# EAGLE board Ver1_ConEDIT1 (EAGLE 7.6.0)
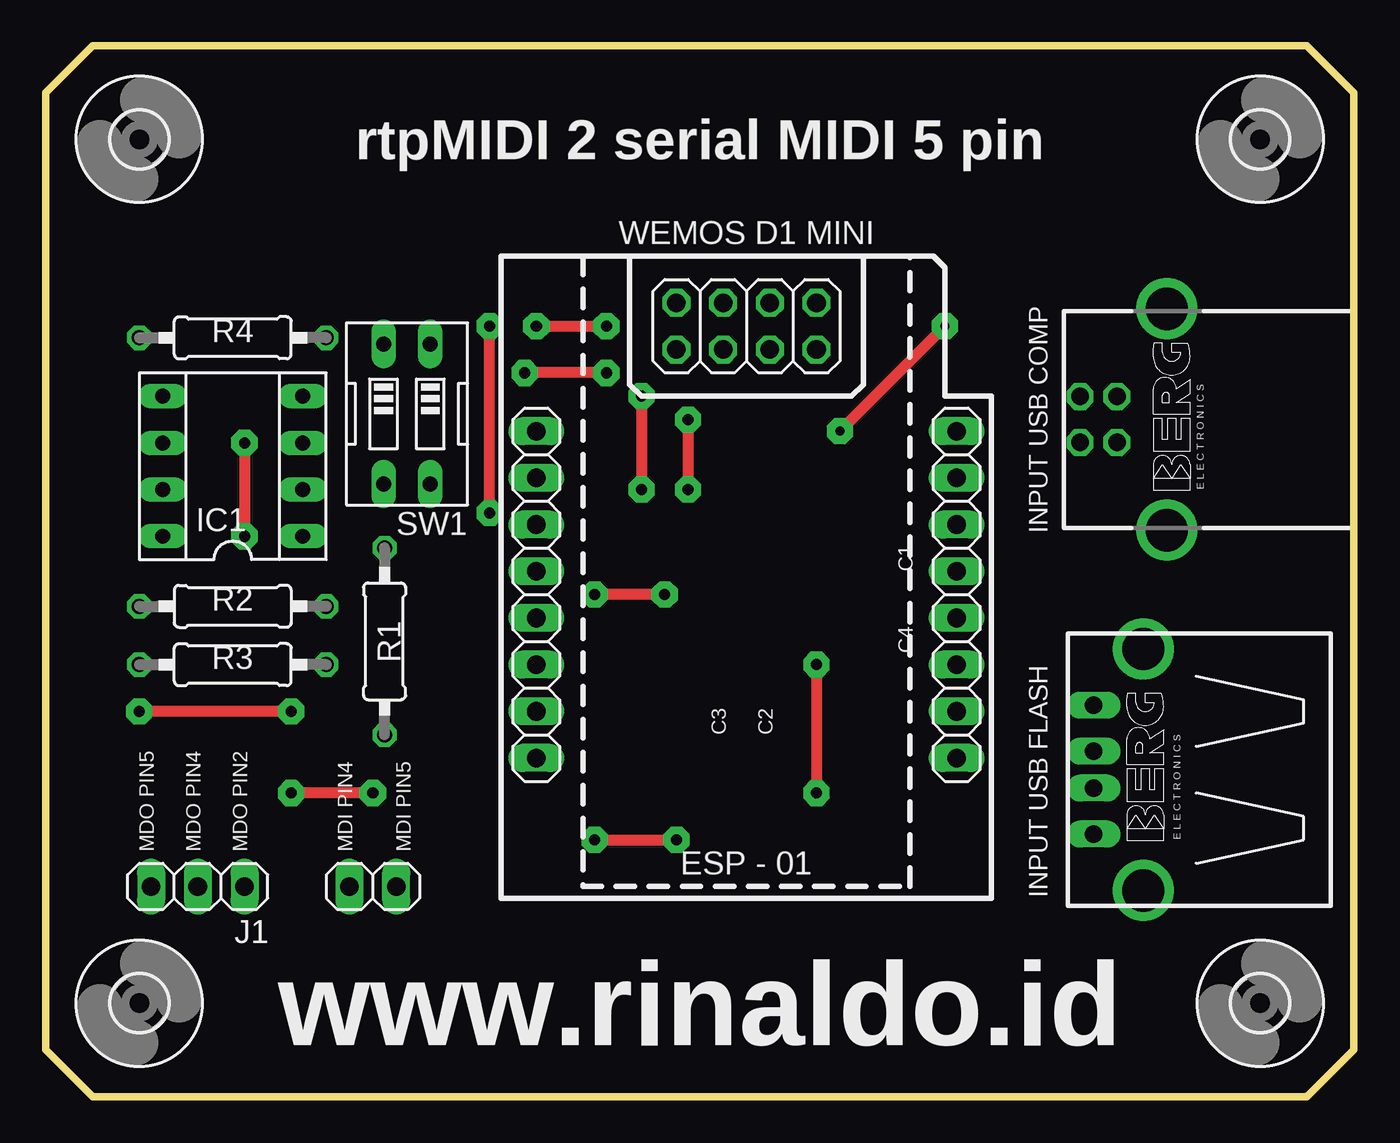
[diagram p0: board, top side]
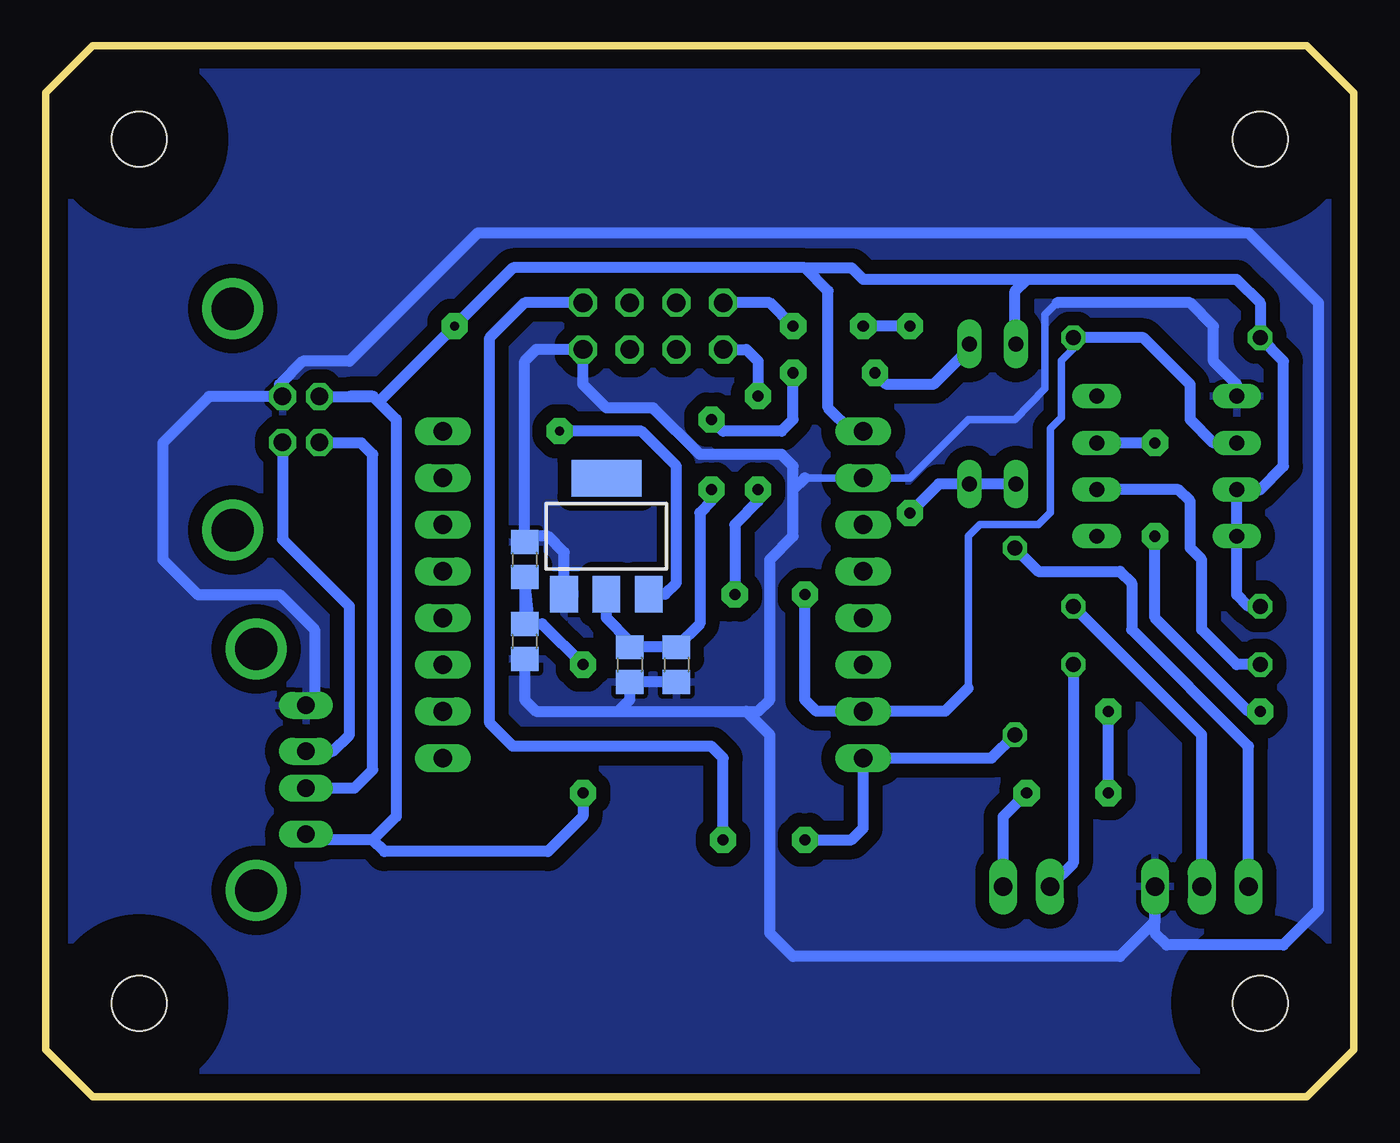
[diagram p1: board, bottom side, seen from below]

Size 71.12 x 57.15 mm. Coordinates in mm from the lower left corner, seen from the top.
Outline: 2.54,0 68.58,0 71.12,2.54 71.12,54.61 68.58,57.15 2.54,57.15 0,54.61 0,2.54 2.54,0
Copper layers (1*16): Top 0.035mm / dielectric 1.5mm / Bottom 0.035mm
Design rules "default": minimum track width 10mil, minimum drill 24mil, track to track 8mil, track to pad 8mil, pad to pad 8mil, via to via 8mil, smd to smd 8mil, copper to edge 40mil, drill to drill 8mil, minimum pad ring 10mil, minimum via ring 8mil, stop-mask expansion 4mil, vias tented up to drill 0mil, thermal gap 10mil

## Footprints (pad centres in the part's own frame; a part is rotated, then mirrored left to right if it is on the bottom)
2X04 = drill 1.016 octagon: 1 -3.81,-1.27; 2 -3.81,1.27; 3 -1.27,-1.27; 4 -1.27,1.27; 5 1.27,-1.27; 6 1.27,1.27; 7 3.81,-1.27; 8 3.81,1.27
1X02 = drill 1.016 long: 1 -1.27,0; 2 1.27,0
PN61729-S = drill 0.95 octagon: 1 1.25,4.71; 2 -1.25,4.71; 3 -1.25,2.71; 4 1.25,2.71 | drill 2.3 pad 2.9: S1 -6.02,0; S2 6.02,0
1X08 = drill 1.016 long: 1 -8.89,0; 2 -6.35,0; 3 -3.81,0; 4 -1.27,0; 5 1.27,0; 6 3.81,0; 7 6.35,0; 8 8.89,0
PN87520-S = drill 0.95 long: 1 -3.5,2.71; 2 -1,2.71; 3 1,2.71; 4 3.5,2.71 | drill 2.3 pad 2.9: S1 -6.57,0; S2 6.57,0
SOT223 = smd 1.5 x 2: 1 -2.3,-3.15; 2 0,-3.15; 3 2.3,-3.15 | smd 3.8 x 2: 4 0,3.15
C0805 = smd 1.3 x 1.5: 1 -0.95,0; 2 0.95,0
3,0 = hole 3: 0,0
SOCKET-08 = drill 0.813 long: 1 -3.81,-3.81; 2 -1.27,-3.81; 3 1.27,-3.81; 4 3.81,-3.81; 5 3.81,3.81; 6 1.27,3.81; 7 -1.27,3.81; 8 -3.81,3.81
1X03 = drill 1.016 long: 1 -2.54,0; 2 0,0; 3 2.54,0
0207/10 = drill 0.813 octagon: 1 -5.08,0; 2 5.08,0
EDG-02 = drill 0.813 long: 1 -1.27,-3.81; 2 1.27,-3.81; 3 1.27,3.81; 4 -1.27,3.81

## Placement (x,y rotation side)
E$1  [2X04]  38.1,41.91 0 top
E$2  [1X02]  17.78,11.43 0 top
E$3  [PN61729-S]  60.96,36.83 90 top
E$4  [1X08]  26.67,27.3 90 top
E$6  [PN87520-S]  59.69,17.78 90 top
E$7  [1X08]  49.53,27.3 90 top
E$11  [SOT223]  40.64,30.48 0 bottom
E$12  [C0805]  39.37,23.49 270 bottom
E$13  [C0805]  45.09,24.77 270 bottom
E$14  [3,0]  66.04,52.07 0 top
E$15  [C0805]  36.83,23.49 270 bottom
E$16  [C0805]  45.09,29.21 270 bottom
E$17  [3,0]  66.04,5.08 0 top
E$18  [3,0]  5.08,52.07 0 top
E$19  [3,0]  5.08,5.08 0 top
IC1  [SOCKET-08]  10.16,34.29 90 top
J1  [1X03]  8.25,11.43 180 top
R1  [0207/10]  18.41,24.77 270 top
R2  [0207/10]  10.16,26.67 180 top
R3  [0207/10]  10.16,23.49 0 top
R4  [0207/10]  10.16,41.27 0 top
SW1  [EDG-02]  19.63,37.13 180 top

## Library data of the parts
E$1 E$2 E$4 E$7 J1 = pinhead
E$3 E$6 = con-berg
E$11 = v-reg
E$12 E$13 E$15 E$16 R1-R4 = rcl
E$14 E$17-E$19 = holes
IC1 = ic-package
SW1 = special

## Nets
GND: E$3.4 E$6.4 E$11.1 E$12.2 E$13.2 E$15.2 E$16.1 IC1.5 J1.1
S$1: IC1.2 R3.1
S$2: E$11.2 E$12.1 E$15.1
S$3: IC1.6 R4.2
S$4: E$1.2 SW1.3 SW1.4
S$6: J1.3 R1.1
S$7: E$4.1 R1.2
S$8: J1.2 R2.1
S$10: E$3.2 E$6.2
S$11: E$3.3 E$6.3
S$12: E$2.2 IC1.3
S$13: E$2.1 R3.2
S$14: E$3.1 E$6.1 E$11.3 E$13.1 E$16.2 IC1.7 IC1.8 R2.2 R4.1

## Tracks (layer width: path | path; a pad name or v marks a point on that pad's centre or on a via)
GND
  Bottom 0.406: 29.84,33.66 24.13,33.66 20.95,36.83 18.41,36.83 16.79,38.51 16.79,42.55 16.13,43.18
  Bottom 0.61: E$6.4 56.52,21.74 56.52,25.4 58.42,27.3 62.86,27.3 64.77,29.21 64.77,35.56 62.25,38.08 E$3.4 58.42,38.25 58.42,38.73 57.15,40 54.61,40 47.62,46.99 5.71,46.99 1.9,43.18 1.9,10.16 3.81,8.26 10.16,8.26 10.79,8.89 J1.1 10.79,9.53 12.7,7.62 30.48,7.62 31.75,8.89 31.75,19.69 33.02,20.95 | E$13.2 45.09,21.59 44.45,20.95 40,20.95 | E$15.2 E$12.2 39.37,21.59 40,20.95 | 40,20.95 33.02,20.95 | 33.02,20.95 32.38,20.95 31.75,21.59 31.75,29.21 30.48,30.48 30.48,33.02 | 30.48,33.02 30.48,34.29 31.12,34.92 35.56,34.92 38.1,37.46 40.64,37.46 41.91,38.73 41.91,40.64 44.45,40.64 45.09,40 E$16.1 44.77,30.48 43.81,30.48 42.94,29.6 E$11.1 | 30.48,33.02 29.84,33.66 | 16.13,43.18 8.89,43.18 7.62,41.91 7.62,40 6.35,38.73 IC1.5
  pour Bottom (isolate 0.762): 0,54.61 2.54,57.15 68.58,57.15 71.12,54.61 71.12,2.54 68.58,0 2.54,0 0,2.54
S$1
  Bottom 0.61: IC1.2 9.52,33.02 8.89,32.38 8.89,29.84 8.25,29.21 8.25,25.4 6.35,23.49 R3.1
S$2  (via drill 0.6 pad 1.42)
  Top 0.61: v34.92,36.83 v34.92,33.02 | v30.48,39.37 v26.03,39.37
  Bottom 0.61: E$11.2 40.64,26.03 39.37,24.77 E$12.1 E$15.1 35.56,25.71 35.56,31.75 34.92,32.38 v34.92,33.02 | v34.92,36.83 34.29,36.2 31.12,36.2 30.48,36.83 v30.48,39.37 | v26.03,39.37 25.4,38.73 22.86,38.73 20.95,40.64
S$3  (via drill 0.6 pad 1.42)
  Top 0.61: v32.38,38.1 v32.38,33.02 | v33.66,27.3 v29.84,27.3
  Bottom 0.406: 20.95,22.23 20.95,30.48 20.32,31.12 17.14,31.12 16.48,31.77 16.48,36.35 15.9,36.93 15.9,40.03 15.24,40.69 R4.2
  Bottom 0.61: v32.38,33.02 32.38,32.38 33.66,31.12 v33.66,27.3 | 34.29,40.64 33.02,40.64 32.38,40 v32.38,38.1 | v29.84,27.3 29.84,21.59 29.21,20.95 22.23,20.95 20.95,22.23 | R4.2 11.43,41.27 8.89,38.73 8.89,36.83 7.62,35.56 IC1.6
S$4  (via drill 0.6 pad 1.42)
  Top 0.61: v26.67,41.91 v30.48,41.91 | v24.13,31.75 v24.13,41.91
  Bottom 0.61: SW1.3 SW1.4 22.55,33.32 v24.13,31.75 | v30.48,41.91 31.75,43.18 E$1.2 | v24.13,41.91 v26.67,41.91
S$6
  Bottom 0.61: R1.1 17.14,28.57 12.7,28.57 12.06,27.94 12.06,25.4 5.71,19.05 J1.3
S$7  (via drill 0.6 pad 1.42)
  Top 0.61: v29.84,13.97 v34.29,13.97
  Bottom 0.61: v34.29,13.97 34.29,18.41 34.92,19.05 45.72,19.05 46.99,20.32 46.99,41.27 45.09,43.18 41.91,43.18 | R1.2 19.69,18.41 E$4.1 26.67,14.6 27.3,13.97 v29.84,13.97
S$8
  Bottom 0.61: J1.2 8.25,19.69 R2.1
S$10
  Bottom 0.61: E$6.2 54.34,16.78 53.34,17.78 53.34,34.92 53.97,35.56 56.23,35.56 E$3.2
S$11
  Bottom 0.61: E$3.3 58.25,30.31 54.61,26.67 54.61,19.69 55.52,18.78 E$6.3
S$12  (via drill 0.6 pad 1.42)
  Top 0.61: v10.79,35.56 v10.79,30.48 | v17.78,16.51 v13.33,16.51 | v13.33,20.95 v5.08,20.95
  Bottom 0.61: v10.79,35.56 IC1.3 | E$2.2 19.05,15.24 v17.78,16.51 | v13.33,16.51 v13.33,20.95 | v5.08,20.95 5.71,20.95 10.79,26.03 v10.79,30.48
S$13
  Bottom 0.61: R3.2 15.24,12.7 E$2.1
S$14  (via drill 0.5 pad 1.42, 0.6 pad 1.42)
  Top 0.61: v41.91,23.49 v41.91,16.51 | v43.18,36.2 v48.89,41.91
  Bottom 0.61: 44.79,25.42 E$16.2 E$13.1 44.13,25.71 v41.91,23.49 | R2.2 5.71,26.67 6.35,27.3 IC1.8 IC1.7 5.08,33.02 3.81,34.29 3.81,40 R4.1 5.08,43.18 6.35,44.45 17.78,44.45 | 54.61,38.08 E$3.1 56.52,38.34 | 54.61,38.08 53.32,38.08 53.02,37.78 | 53.02,37.78 52.07,36.83 52.07,15.24 53.34,13.97 | 53.34,13.97 56.67,13.97 E$6.1 | v41.91,16.51 41.91,15.24 43.81,13.33 52.7,13.33 53.34,13.97 | 29.84,45.09 45.72,45.09 v48.89,41.91 53.02,37.78 | 53.34,38.1 54.59,38.1 54.61,38.08 | 26.67,36.2 27.3,36.2 28.57,37.46 28.57,43.81 29.84,45.09 | 29.84,45.09 27.3,45.09 26.67,44.45 17.78,44.45 | 18.41,40.64 18.41,43.81 17.78,44.45 | E$11.3 37.44,27.33 36.83,27.94 36.83,34.29 38.73,36.2 v43.18,36.2

## Text on the board
tPlace: List Component : | R4 : 4K7 @1Pcs / / R1 - 3 : 220 @3pcs / / IC1 : 6N137 @1Pcs / / Pin Header @1Pcs / / FEMALE HEADER 1x8 @2Pcs / / USB FEMALE A @1Pcs / / USB FEMALE B @1Pcs / / AMS 1117 3V3 @1Pcs / / C1 - C2 : 1uF @2Pcs / / C3 - C4 : 4,7UF @2pcs / / FEMALE HEADER 2 x 4 @1Pcs | WEMOS D1 MINI | INPUT USB COMP | INPUT USB FLASH | ESP - 01
tNames: rtpMIDI 2 serial MIDI 5 pin | C1 | C4 | C3 | C2 | MDO PIN5 | MDO PIN4 | MDO PIN2 | MDI PIN4 | MDI PIN5 | www.rinaldo.id